# Altium PCB PCB_NFC通信_小圆_2021-12-08.pcbdoc
Units mil, origin at the board's own origin, x right, y up, seen from the top; angles counter-clockwise.
Board outline 4385.09 x 3139.13 mil, 2 copper layers (Top Layer, Bottom Layer); 5 components, 9 nets, 17 pads, 2 vias.
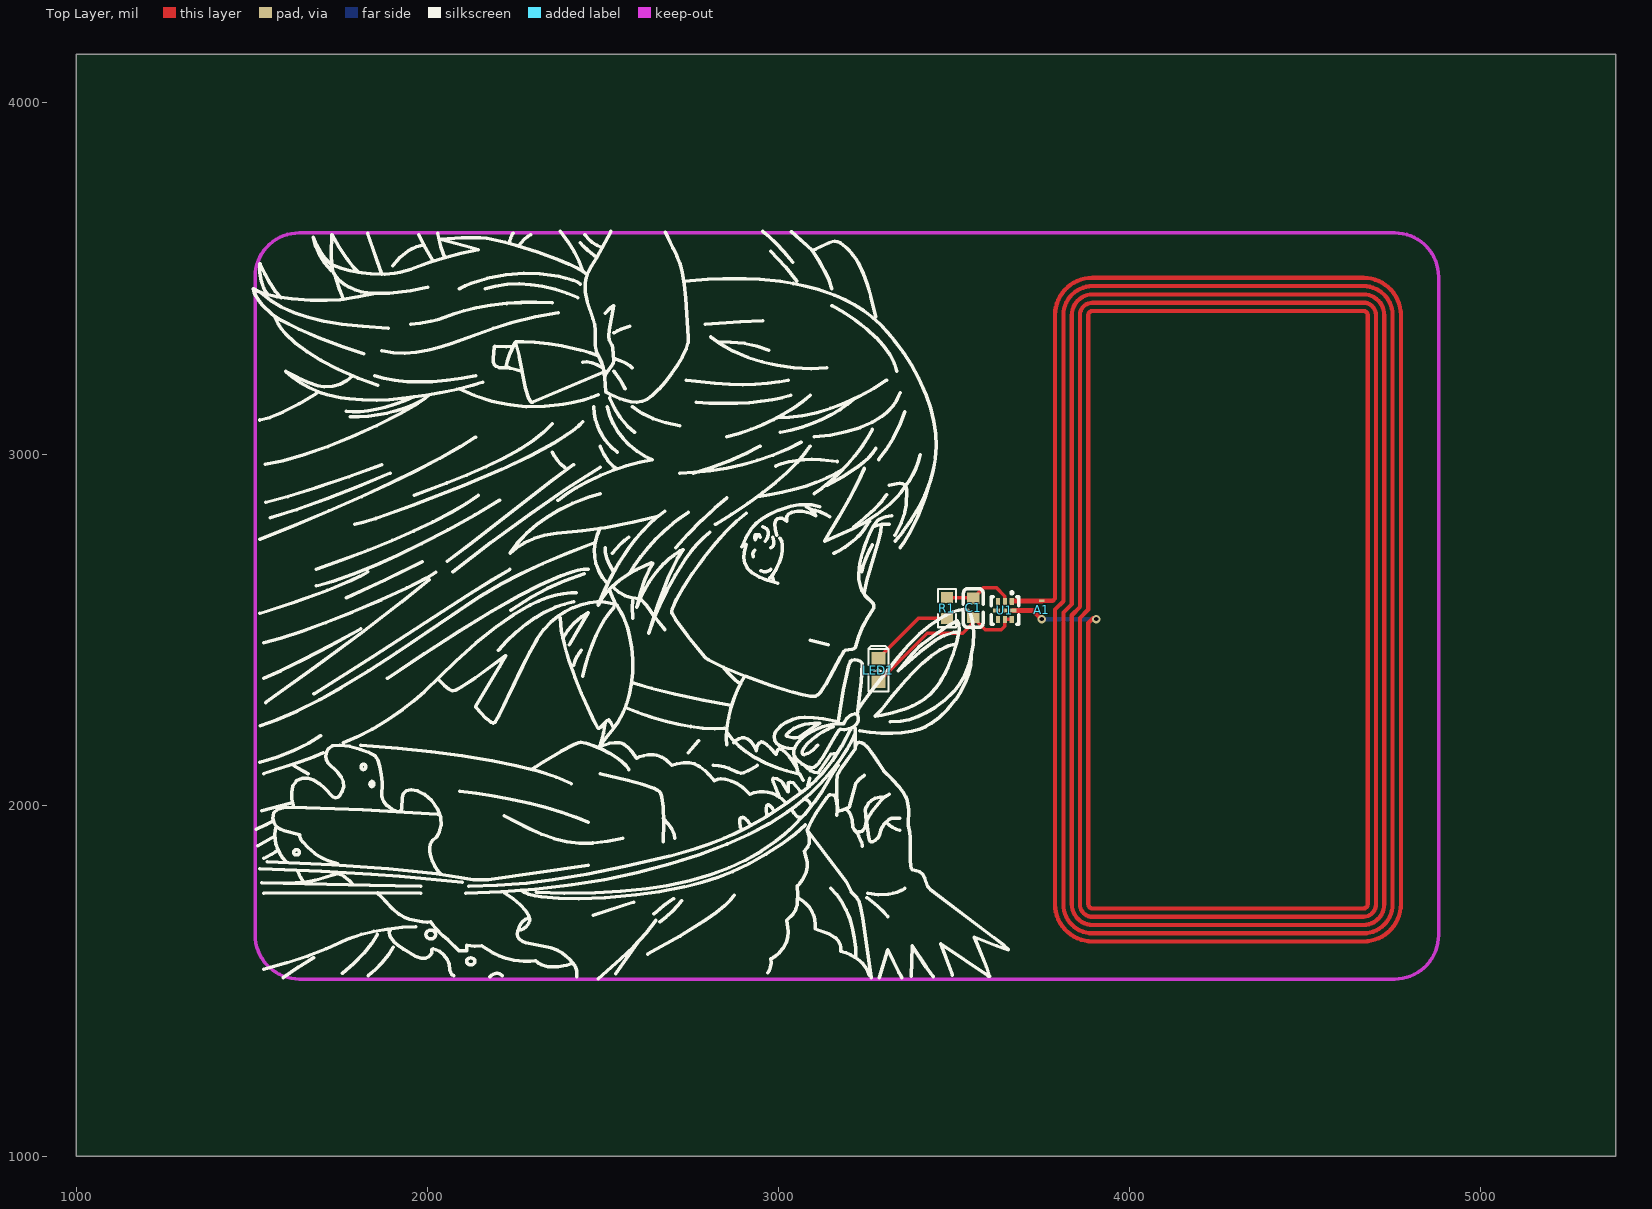
[diagram p0: Top Layer view]
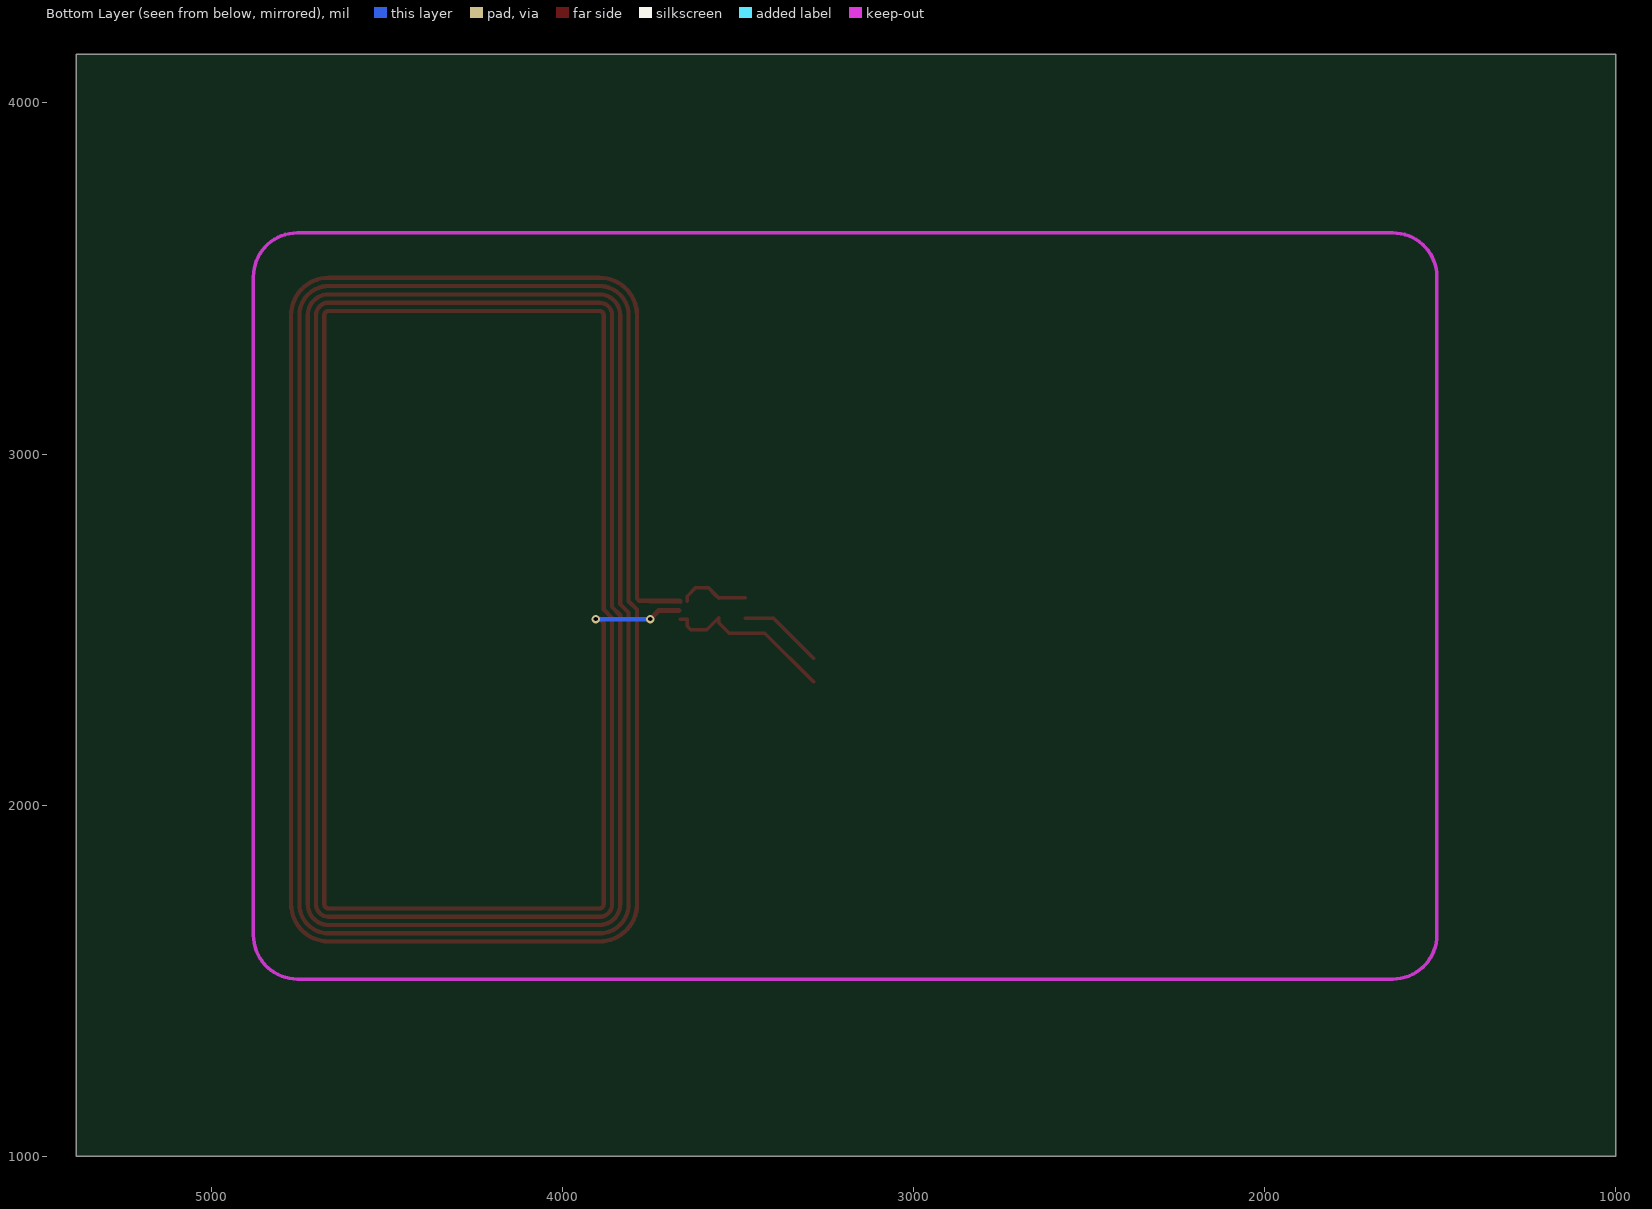
[diagram p1: Bottom Layer view, seen from below]

## Layer stack, top to bottom
Top Layer: signal copper (thickness not stored)
Dielectric: dielectric 12.6, FR-4, Dk 4.8
Bottom Layer: signal copper (thickness not stored)

## Board outline
5385.09,1000 1000,1000 1000,4139.13 5385.09,4139.13

## Components (designator, comment, footprint, x,y, rotation, side; value= is the part's Value field where it differs from the comment)
A1 "NFC_ANTENNA" NFC天线 4320.01,2580 r0 top
C1 "220nF" C0603 3555.01,2561.87 r90 top
LED1 "LED-0603_G" LED0603_GREEN 3285.01,2385 r90 top
R1 "10k" R0603 3480.01,2561.57 r90 top
U1 "NT3H1101W0FHKH" XQFN-8_L1.6-W1.6-P0.50-BR 3645.01,2555 r90 top

## Footprints (in the part's own frame and the unit in brackets; to place one, negate y for a bottom-side part, rotate by r counter-clockwise, add the part's x,y. Pads: shape width x height; smd on the part's side, far side on the other; paste and mask are expansions set on the pad)
C0603 [mm]
  rect 0.8x0.9 smd: 1(-0.7,0) 2(0.7,0)
  silkscreen extent -1.41,-0.71 1.39,0.72
LED0603_GREEN [mm]
  rect 0.9x1 smd: 1(-0.85,0) 2(0.85,0)
  silkscreen extent -1.54,-0.73 1.75,0.73
NFC天线 [mm]
  rect 0.4x0.2 smd: 1(-14.462,0.055) 2(-14.478,-1.27)
  Top Layer lines w0.305: -14.462,0.055 -14.335,0.055 -13.675,0.055 -13.523,0.22 -13.523,20.72 cw(c-10.814,20.711) -10.805,23.42 8.8,23.42 cw(c8.8,20.72) 11.5,20.72 11.5,-21.89 cw(c8.803,-21.886) 8.8,-24.583 -10.805,-24.583 cw(c-10.818,-21.878) -13.523,-21.89 -13.523,-0.58 -12.913,0.02 -12.913,20.72 cw(c-10.809,20.716) -10.805,22.82 8.8,22.82 cw(c8.8,20.72) 10.9,20.72 10.9,-21.89 cw(c8.795,-21.894) 8.8,-23.998 -10.805,-23.998 cw(c-10.805,-21.89) -12.913,-21.89 -12.913,-0.783 -12.303,-0.18 -12.303,20.72 cw(c-10.804,20.721) -10.805,22.22 8.8,22.22 cw(c8.8,20.72) 10.3,20.72 10.3,-21.89 cw(c8.8,-21.89) 8.8,-23.389 -10.805,-23.389 cw(c-10.805,-21.89) -12.303,-21.89 -12.303,-0.986 -11.719,-0.38 -11.719,20.72 cw(c-10.812,20.713) -10.805,21.62 8.8,21.62 cw(c8.8,20.72) 9.7,20.72 9.7,-21.89 cw(c8.792,-21.897) 8.8,-22.805 -10.805,-22.805 cw(c-10.805,-21.89) -11.719,-21.89 -11.719,-1.189 -11.11,-0.58 -11.11,20.72 cw(c-10.807,20.718) -10.805,21.02 8.8,21.02 cw(c8.8,20.72) 9.1,20.72 9.099,-21.89 cw(c8.797,-21.893) 8.8,-22.195 -10.805,-22.195 cw(c-10.805,-21.89) -11.11,-21.89 -11.11,-1.547 -10.77,-1.206 -10.706,-1.27 -10.541,-1.27
  Bottom Layer lines w0.305: -14.478,-1.27 -10.541,-1.27
R0603 [mil]
  rect 31.75x34.02 smd: 1(-29.66,0) 2(29.65,0)
  silkscreen extent -55,-26 55,26
XQFN-8_L1.6-W1.6-P0.50-BR [mm]
  rect 0.5x0.3 smd: 1(0.65,-0.5) 2(0.65,0) 3(0.65,0.5) 5(-0.65,0.5) 6(-0.65,0) 7(-0.65,-0.5)
  rect 0.3x0.5 smd: 4(0,0.6) 8(0,-0.6)
  rect 0.3x0.3 smd: 9(0,0)
  silkscreen extent -1,-1 1.33,1

## Via types
v1: diameter 24, hole 12, Top Layer to Bottom Layer, 2 vias

## Nets (pads, with @x,y where several pads share a name; then routed paths per layer and width w, separated by ;. In a path a pad name is that pad's centre, name@x,y a point inside that pad or via, vN(x,y) a via of type N, cw(c..) or ccw(c..) an arc to the next point about the centre after c; other vN are vias at no path point)
GND: C1.2 R1.2 U1.2 | length 203.3
  Top Layer w10: R1.2 3553.22,2591.22 C1.2 ; C1.2 3561.41,2595.9 3585.01,2620 3620.01,2620 3645.01,2595 U1.2
LA: A1.1 U1.1 | length 86.6
  Top Layer w14: U1.1 3666.29,2582.18 A1.1
LB: A1.2 U1.8 | length 91.7
  Top Layer w14: U1.8 3725.01,2555 A1.2
LED1_2: LED1.2 R1.1 | length 242
  Top Layer w10: LED1.2 3398.46,2531.91 R1.1
S$243: 
S$245: 
S$268: 
S$270: 
VCC: C1.1 LED1.1 U1.6 U1.7 | length 501.5
  Top Layer w10: LED1.1 3423.48,2490 3525.01,2490 3555.01,2520 C1.1 3589.32,2500 3635.01,2500 3645.01,2510 U1.6 U1.7
pads on no net: U1.3 U1.4 U1.5 U1.9
copper on no net:
  other v1: 3750.01,2530 3905.01,2530

## Keep-outs
Keep-Out Layer:
  lines w10 net S$243: 4754.89,1505 ccw(c4754.89,1630.2) 4880.09,1630.2
  lines w10 net S$245: 1510.01,1630.2 ccw(c1635.21,1630.2) 1635.21,1505
  lines w10 net S$268: 4754.89,3630.2 cw(c4754.89,3505) 4880.09,3505
  lines w10 net S$270: 1510.01,3505 cw(c1635.21,3505) 1635.21,3630.2

## Silkscreen, mask and mechanical layers (free items; w line width, h text height)
Top Overlay:
  drawing of 2098 lines, arcs and shapes, not listed